# Altium PCB Nine-axis Gyroscope Module.PcbDoc
Units mil, origin at the board's own origin, x right, y up, seen from the top; angles counter-clockwise.
Board outline 505 x 595 mil, 4 copper layers (Top Layer, POWER, SIGNAL, Bottom Layer), stack 23.756 mil thick; 32 components, 23 nets, 130 pads, 33 vias.
Unrouted connection lines stored in the file: 17.
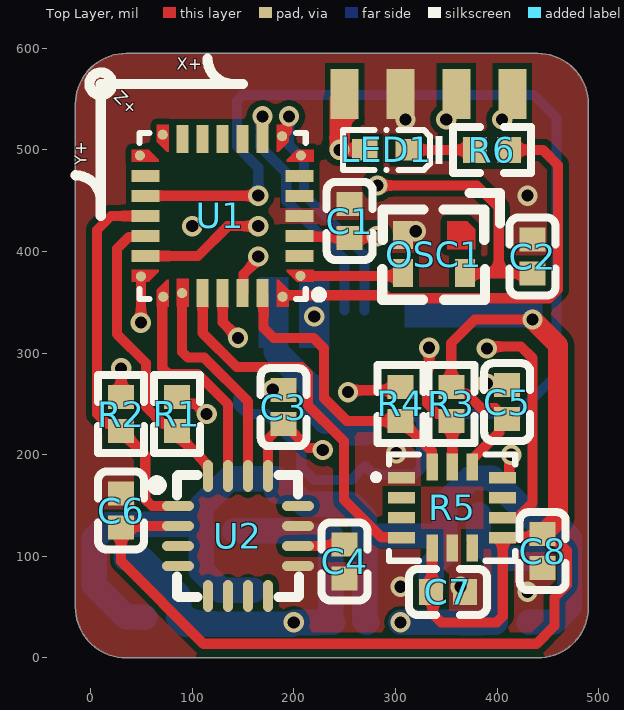
[diagram p0: Top Layer view]
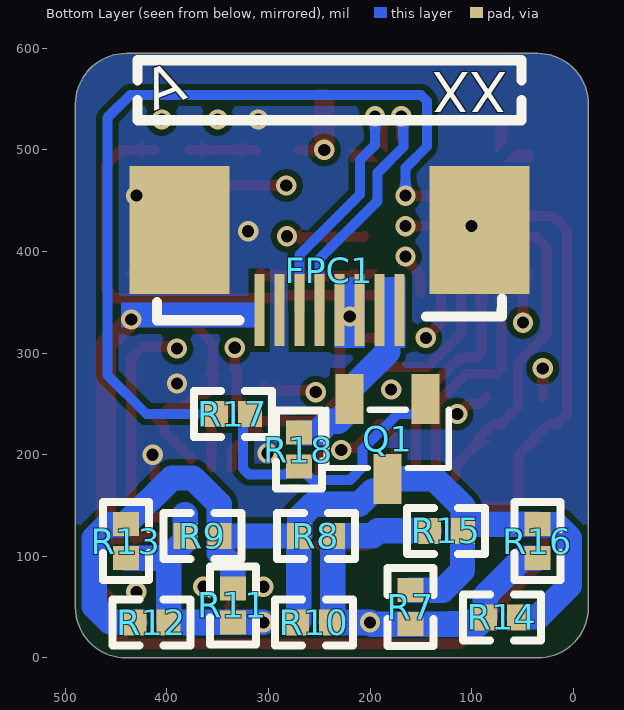
[diagram p1: Bottom Layer view, seen from below]
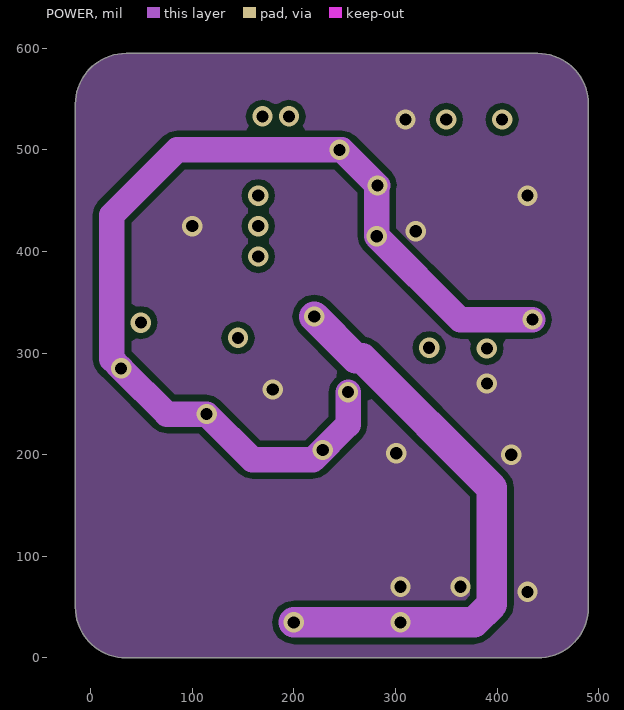
[diagram p2: POWER]
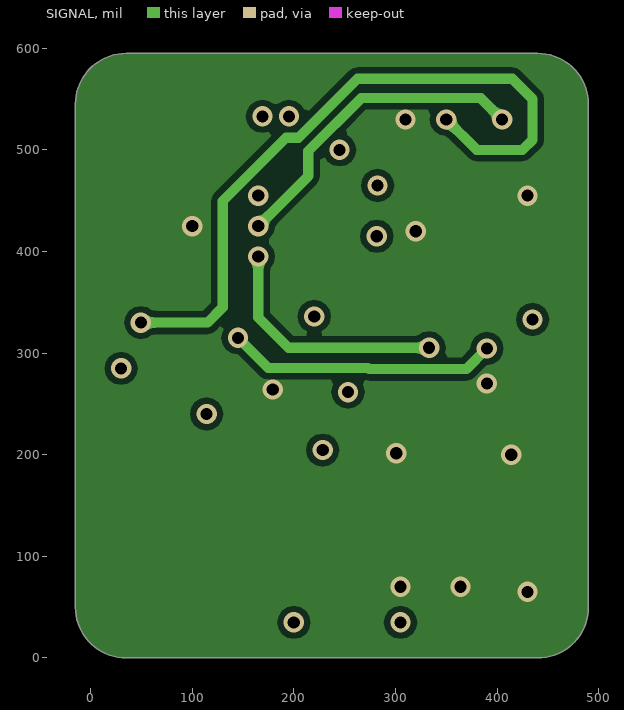
[diagram p3: SIGNAL]
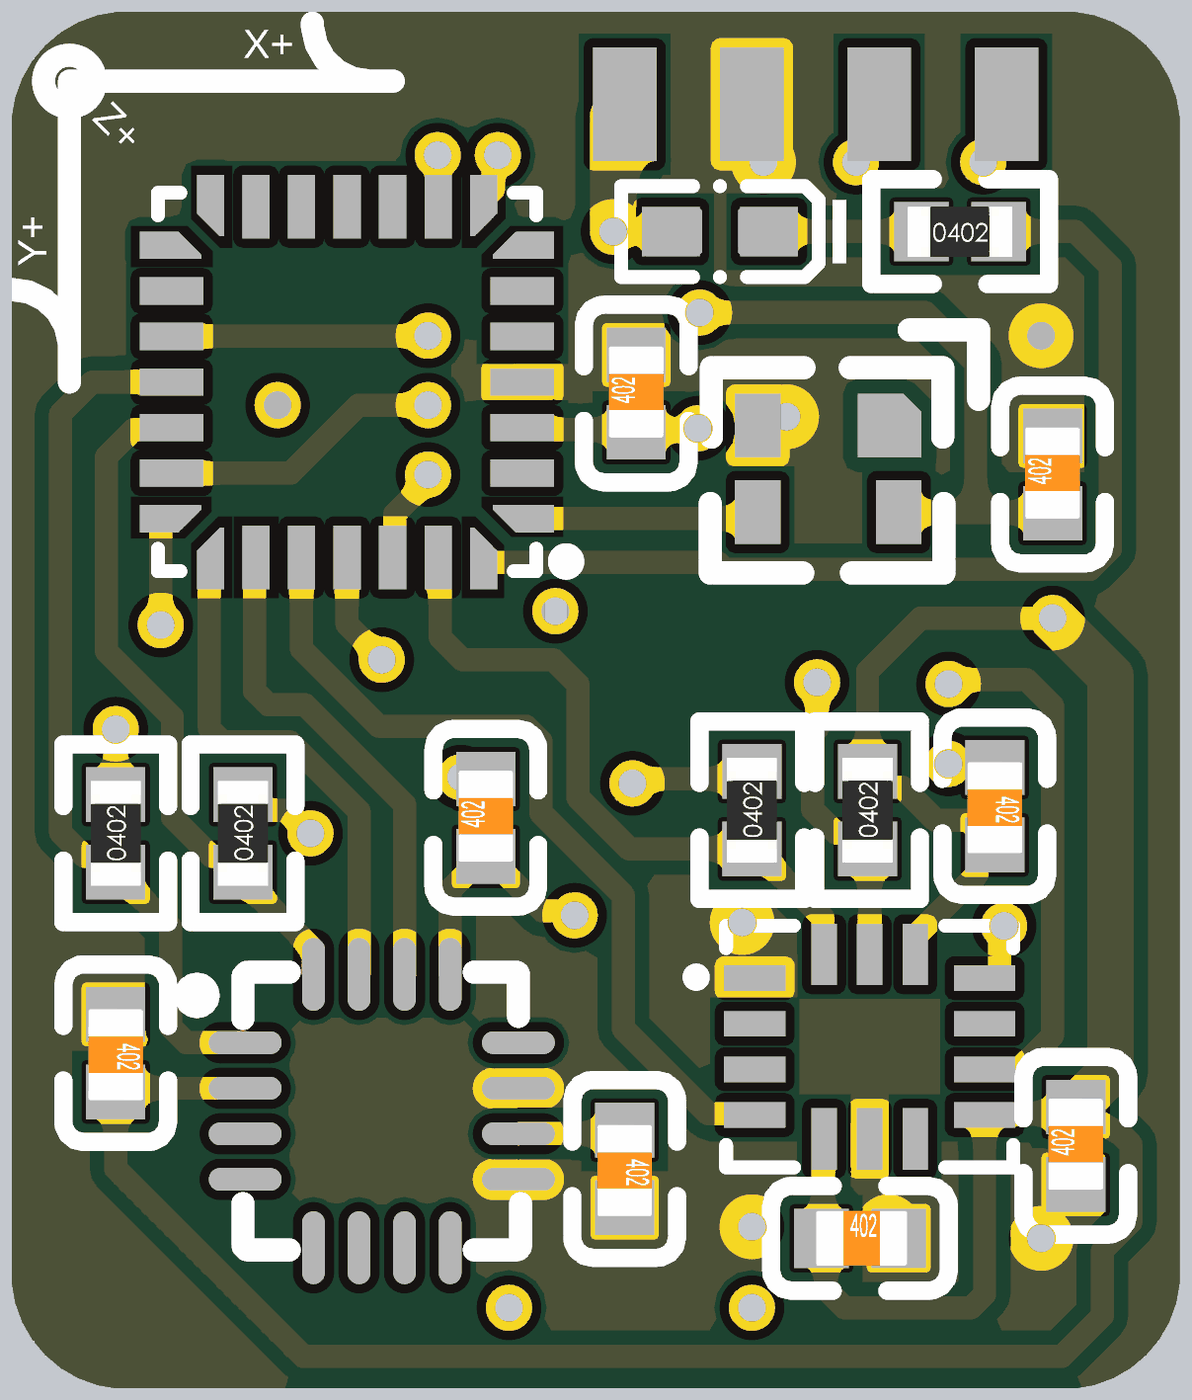
[diagram p4: 3D render of the assembled board from above, using the file's embedded part models]
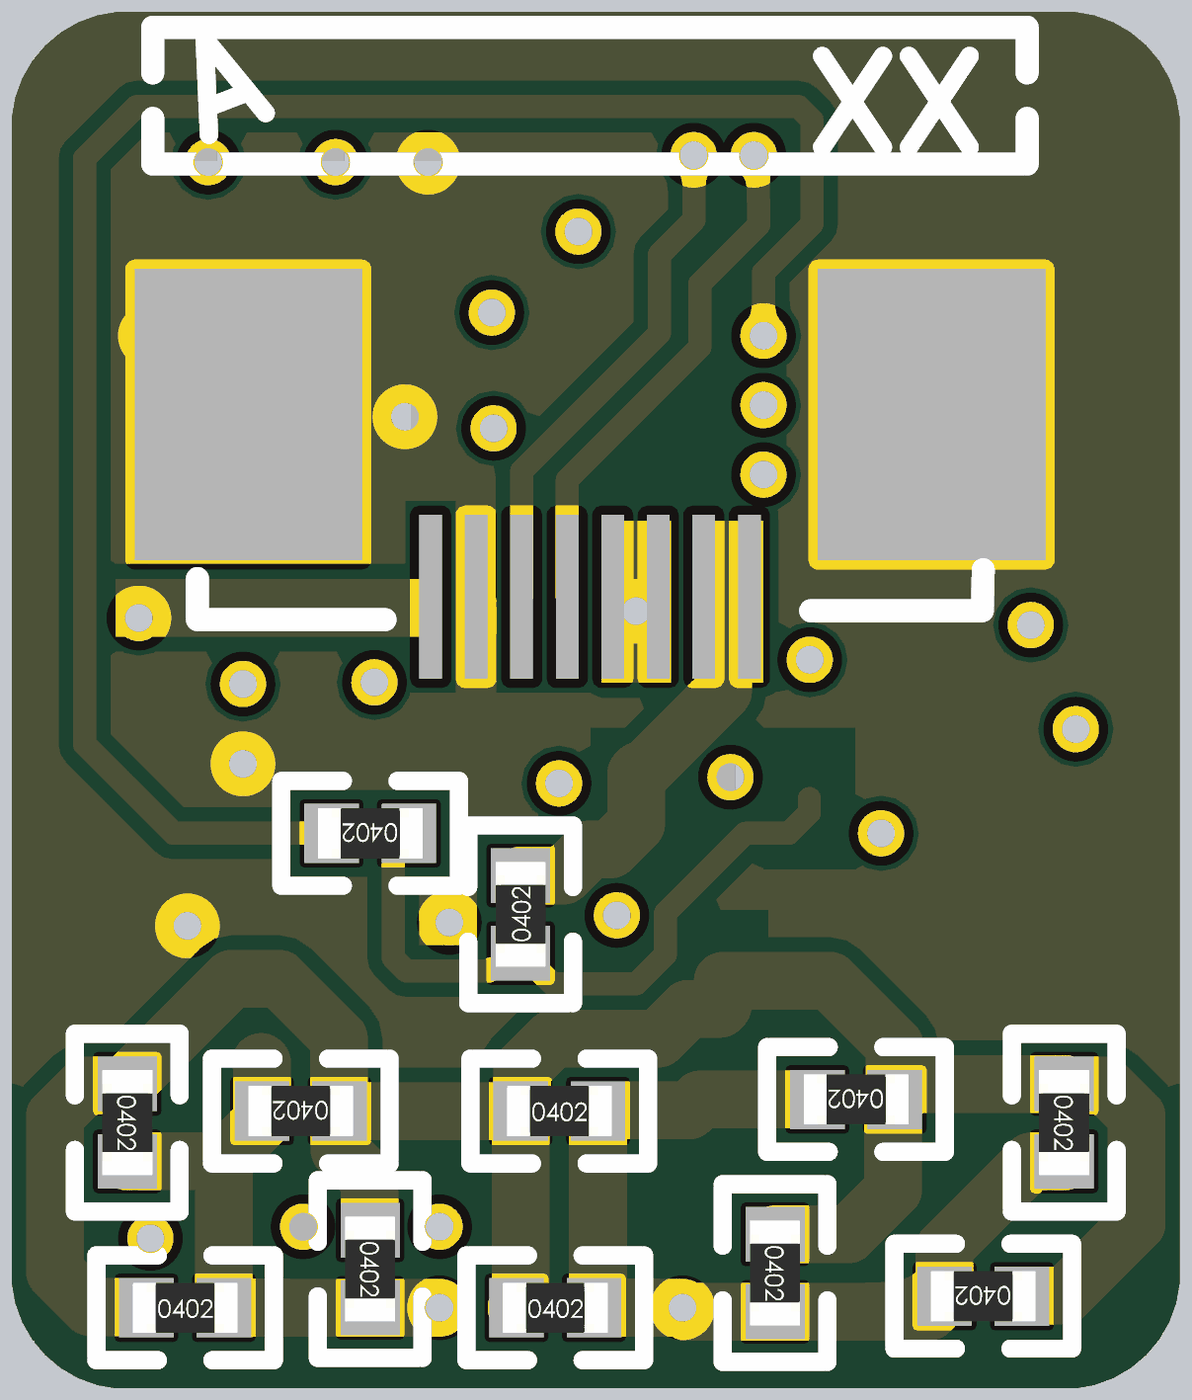
[diagram p5: 3D render of the assembled board from below, using the file's embedded part models]

## Layer stack, top to bottom
Top Solder: solder mask 0.4, Solder Resist, Dk 3.5
Top Layer: signal copper 1.4
Dielectric 2: prepreg 2.8, PP-006, Dk 4.1
POWER: signal copper 1.378
Dielectric 1: dielectric 12.6, FR-4, Dk 4.8
SIGNAL: signal copper 1.378
Dielectric 3: prepreg 2.8, PP-006, Dk 4.1
Bottom Layer: signal copper 1.4
Bottom Solder: solder mask 0.4, Solder Resist, Dk 3.5

## Board outline
-15,50 -15,545 cw(c35,545) 35,595 440,595 cw(c440,545) 490,545 490,50 cw(c440,50) 440,0 35,0 cw(c35,50)

## Design rules (kind name [scope] priority, off if disabled: settings)
Clearance [All] p1: gap=6 ignorepadtopadclearanceinfootprint=FALSE except(0: Arc-Hole Track-Hole SMDPad-Hole THPad-Hole Via-Text Via-Hole Fill-Hole Poly-Hole Region-Hole Text-Hole; 8: Text-Text)
MinimumSolderMaskSliver [All] p1: minsoldermaskwidth=0
PolygonConnect [All] p1: connectstyle=Direct reliefconductorwidth=10 reliefentries=4 polygonreliefangle="90 Angle" airgapwidth=10
RoutingVias [All] p1: holewidth=12 width=20 viastyle="Through Hole" minholewidth=12 minwidth=20 maxholewidth=12 maxwidth=20
SilkToSilkClearance [All] p1: silktosilkclearance=0
SilkToSolderMaskClearance [IsPad] p1: minsilkscreentomaskgap=0 clearancetoexposedcopper=TRUE
SolderMaskExpansion [All] p1: expansion=4 istentingtop=FALSE
Width [InNetClass('POWER')] p1: maxlimit=40 minlimit=10 preferedwidth=40 midlayer1_minwidth=40 midlayer2_minwidth=40 minimp=50.000000 maximp=50.000000 favimp=50.000000
27 further rules are at their usual default settings.

## Components (designator, comment, footprint, x,y, rotation, side; value= is the part's Value field where it differs from the comment)
C1 "100nF" 0402_C 255,430 r90 top
C2 "100nF" 0402_C 435,395 r90 top
C3 "100nF" 0402_C 190,246.73 r90 top
C4 "4.7uF" 0402_C 250,95 r270 top
C5 "100nF" 0402_C 410,251.73 r270 top
C6 "100nF" 0402_C 30,145 r270 top
C7 "100nF" 0402_C 351.73,65 r0 top
C8 "100nF" 0402_C 445,105 r90 top
FPC1 "LW05202-08" FPC-SMD_8P-P0.50_LW05202-08 240,450 r0 bottom
LED1 "LED" LED0402-RD 335.18,233.89 r180 top
OSC1 "8MHz" OSC-SMD_4P-L2.0-W1.6-BL_ABRACON_AMPMAXXX 345,405 r180 top
Q1 "YJL3400A" SOT-23-3_L2.9-W1.3-P1.90-LS2.4-BR 16779.6,-16736.99 r90 bottom
R1 "4.7KΩ" 0402_R 85,240 r90 top
R2 "4.7KΩ" 0402_R 30,240 r90 top
R3 "4.7KΩ" 0402_R 355,250 r90 top
R4 "4.7KΩ" 0402_R 305,250 r90 top
R5 "ICM-42688-P" LGA-14_L3.0-W2.5-P0.50-TL 351.18,143.53 r0 top
R6 "4.7K" 0402_R 395,500 r0 top
R7 "430R" 0402_R 160,50 r270 bottom
R8 "430R" 0402_R 253.27,120 r180 bottom
R9 "430R" 0402_R 365,120 r0 bottom
R10 "430R" 0402_R 255,35 r180 bottom
R11 "430R" 0402_R 335,51.73 r270 bottom
R12 "430R" 0402_R 415,35 r180 bottom
R13 "430R" 0402_R 440,115 r270 bottom
R14 "430R" 0402_R 70,40 r0 bottom
R15 "430R" 0402_R 125,125 r0 bottom
R16 "430R" 0402_R 35,115 r270 bottom
R17 "120R" 0402_R 335,240 r0 bottom
R18 "10K" 0402_R 270,205 r90 bottom
U1 "STM32G031G8U6" UFQFPN-28_L4.0-W4.0-P0.50-BL 130,435 r90 top
U2 "IST8310" LGA-16-3*3 140,120 r0 top

## Footprints (in the part's own frame and the unit in brackets; to place one, negate y for a bottom-side part, rotate by r counter-clockwise, add the part's x,y. Pads: shape width x height; smd on the part's side, far side on the other; paste and mask are expansions set on the pad)
0402_C [mm]
  rect 0.6x0.65 smd mask+0.051: 1(-0.425,0) 2(0.425,0)
  silkscreen extent -0.97,-0.58 0.97,0.58, body extent -0.48,-0.3 0.52,0.3, height 0.2
0402_R [mm]
  rect 0.6x0.65 smd mask+0.051: 1(-0.425,0) 2(0.425,0)
  silkscreen extent -0.97,-0.58 0.97,0.58, body extent -0.57,-0.27 0.58,0.28, height 0.41
FPC-SMD_8P-P0.50_LW05202-08 [mm]
  rect 0.25x1.8 smd: 1(1.75,2.738) 2(1.25,2.738) 3(0.75,2.738) 4(0.25,2.738) 5(-0.25,2.738) 6(-0.75,2.738) 7(-1.25,2.738) 8(-1.75,2.738)
  rect 2.5x3.2 smd: 9(-3.75,0.738) 10(3.75,0.738)
  silkscreen extent -4.8,-3.51 4.8,2.99
LED0402-RD [mm]
  rect 0.636x0.54 smd: 1(0.579,-6.759) 2(1.656,-6.759)
  silkscreen extent -0.27,-7.3 2.2,-6.22
LGA-14_L3.0-W2.5-P0.50-TL [mm]
  rect 0.675x0.28 smd: 1(-1.142,0.86) 2(-1.142,0.36) 3(-1.142,-0.14) 4(-1.142,-0.64) 8(1.382,-0.64) 9(1.382,-0.14) 10(1.382,0.36) 11(1.382,0.86)
  rect 0.28x0.675 smd: 5(-0.38,-0.903) 6(0.12,-0.903) 7(0.62,-0.903) 12(0.62,1.122) 13(0.12,1.122) 14(-0.38,1.122)
  silkscreen extent -1.86,-1.22 1.7,1.44
LGA-16-3*3 [mm]
  oval 0.8x0.25 smd: 1(-1.372,0.75) 2(-1.372,0.25) 3(-1.372,-0.25) 4(-1.372,-0.75) 9(1.628,-0.75) 10(1.628,-0.25) 11(1.628,0.25) 12(1.628,0.75)
  oval 0.25x0.8 smd: 5(-0.623,-1.5) 6(-0.123,-1.5) 7(0.377,-1.5) 8(0.877,-1.5) 13(0.877,1.5) 14(0.377,1.5) 15(-0.123,1.5) 16(-0.623,1.5)
  silkscreen extent -2.03,-1.52 1.65,1.52
OSC-SMD_4P-L2.0-W1.6-BL_ABRACON_AMPMAXXX [mm]
  rect 0.5x0.7 smd: 2(0.953,-0.284) 3(0.953,0.666) 4(-0.597,0.666)
  Top Layer region: -0.847,0.066 -0.147,0.066 -0.147,-0.634 -0.647,-0.634 -0.847,-0.434
  silkscreen extent -1.47,-1.33 1.47,1.33
SOT-23-3_L2.9-W1.3-P1.90-LS2.4-BR [mm]
  rect 1.25x0.7 smd: 1(431.596,-422.514) 2(431.596,-420.614) 3(429.597,-421.564)
  silkscreen extent 429.87,-423.09 431.32,-420.04
UFQFPN-28_L4.0-W4.0-P0.50-BL [mm]
  round 0.254 smd mask+0.102: 1(-1.499,-1.943) 7(1.511,-1.956) 8(1.994,-1.486) 14(2.032,1.499) 15(1.511,2.07) 21(-1.511,2.045) 22(-2.019,1.486) 23(-1.93,1.016) 28(-2.019,-1.499)
  rect 0.3x0.7 smd: 2(-1,-1.925) 3(-0.5,-1.925) 4(0,-1.925) 5(0.5,-1.925) 6(1,-1.925) 16(1,1.925) 17(0.5,1.925) 18(0,1.925) 19(-0.5,1.925) 20(-1,1.925)
  rect 0.7x0.3 smd: 9(1.925,-1) 10(1.925,-0.5) 11(1.925,0) 12(1.925,0.5) 13(1.925,1) 24(-1.925,0.5) 25(-1.925,0) 26(-1.925,-0.5) 27(-1.925,-1)
  Top Layer region: -2.275,1.15 -1.575,1.15 -1.575,0.85 -2.275,0.85
  Top Layer region: 1.85,1.65 2.275,1.65 2.275,1.35 1.6,1.35 1.6,1.4
  Top Layer region: 1.65,1.85 1.65,2.275 1.35,2.275 1.35,1.6 1.4,1.6
  Top Layer region: -1.85,1.65 -2.275,1.65 -2.275,1.35 -1.6,1.35 -1.6,1.4
  Top Layer region: -1.65,1.85 -1.65,2.275 -1.35,2.275 -1.35,1.6 -1.4,1.6
  Top Layer region: -1.65,-1.85 -1.65,-2.275 -1.35,-2.275 -1.35,-1.6 -1.4,-1.6
  Top Layer region: -1.85,-1.65 -2.275,-1.65 -2.275,-1.35 -1.6,-1.35 -1.6,-1.4
  Top Layer region: 1.85,-1.65 2.275,-1.65 2.275,-1.35 1.6,-1.35 1.6,-1.4
  Top Layer region: 1.65,-1.85 1.65,-2.275 1.35,-2.275 1.35,-1.6 1.4,-1.6
  silkscreen extent -2.08,-2.51 2.08,2.08

## Part data
C1 C2 C3 C5 C6 C7 C8: library part "0402 100nF (104) 10% 16V", "贴片电容", Package=0402, SuppliersPartNumber=C1525, ComponentLink1Description=供应商链接, ComponentLink1URL=http://www.szlcsc.com/product/details_1877.html, Supplier=LC
C4: library part "0402 4.7uF (475) 20% 10V", "贴片电容", Package=0402, SuppliersPartNumber=C23733, ComponentLink1Description=供应商链接, ComponentLink1URL=http://www.szlcsc.com/product/details_24469.html, Supplier=LC
LED1: library part TJ-S1005CL4T5ALC3DW-A5
OSC1: library part AMPMAFC-25.0000T
R1 R2 R3 R4 R6 R7 R8 R9 R10 R11 R12 R13 R14 R15 R16 R17 R18: library part "0402 4.7KΩ (4701) 1%", "贴片电阻", Package=0402, SuppliersPartNumber=C25900, ComponentLink1Description=供应商链接, ComponentLink1URL=http://www.szlcsc.com/product/details_26643.html, Supplier=LC

## Free pads (board coordinates)
  rect 27.56x49.21 smd: 2(250,555) 2(305,555) 2(360,555) 2(415,555)

## Via types
v1: diameter 20, hole 12, Top Layer to Bottom Layer, 33 vias

## Nets (pads, with @x,y where several pads share a name; then routed paths per layer and width w, separated by ;. In a path a pad name is that pad's centre, name@x,y a point inside that pad or via, vN(x,y) a via of type N, cw(c..) or ccw(c..) an arc to the next point about the centre after c; other vN are vias at no path point)
3V3_IMU: C1.1 C2.1 C3.1 C5.2 C6.2 C7.1 C8.2 FPC1.1 LED1.2 OSC1.4 pad.2@250,555 R1.2 R2.2 R3.2 R4.2 R5.5 R5.8 R5.12 U1.3 U2.2 U2.13 | length 3049.1
  Top Layer w10: R2.2 v1(30,285) ; R1.2 91.81,249.92 103.32,249.92 113.24,240 v1(114.18,240) ; U2.2 31.58,129.85 C6.2 30,95 111,14 439,14 456.46,31.46 456.46,59.57 468.8,71.9 468.8,105.68 465.02,109.46 453.43,116.5 452.8,116.5 C8.2@447.8,119.92 ; U2.13 174.55,215.53 189.02,230 190.98,230 214.52,206.46 226.46,206.46 v1(228.38,204.55) ; U1.3 206.69,414.41 253.86,414.41 C1.1 255.87,414.13 280.79,414.13 v1(281.66,415) ; v1(245,500) LED1.2 ; pad.2@245,550 pad.2@250,555 ; v1(253.37,261.58) 255.29,263.49 301.76,263.49 R4.2 ; v1(282.43,465) 380,465 401.76,443.24 401.76,378.53 ; R5.5 335.71,107.48 335.71,65.71 C7.1 336.94,63.06 336.94,43.06 345,35 399.73,35 405.59,40.86 R5.8 406.1,118.84 442.1,118.84 C8.2 ; OSC1.4 368.79,378.53 401.76,378.53 ; R5.12@376.1,196 402.2,222.1 402.2,228.19 C5.2@409.02,235 ; C5.2 C5.2@409.02,235 ; v1(435,333.02) 378.02,333.02 355,310 R3.2 361.81,259.92 370.08,259.92 384.35,245.65 398.36,245.65 C5.2@409.02,235 ; C2.1 434.73,378.53 401.76,378.53 ; C8.2@447.8,123.54 C8.2@447.8,124.53
  Top Layer w20: v1(245,500) pad.2@245,550 ; v1(435,333.02) 460,308.02 460,136.73 458,134.73 C8.2@447.8,124.53 ; C8.2 445.98,121.73 C8.2@447.8,123.54
  POWER w25: v1(253.37,261.58) 253.37,229.55 218.83,195 159.18,195 v1(114.18,240) 75,240 v1(30,285) 20.96,294.04 20.96,435.96 85,500 v1(245,500) 247.43,500 v1(282.43,465) 281.66,464.22 v1(281.66,415) 363.64,333.02 v1(435,333.02)
5V_HEAT: FPC1.5 FPC1.6 R7.2 R8.2 R9.2 R10.2 R11.2 R12.2 R13.2 R14.2 R15.2 R16.2 | length 1233.2
  POWER w30: v1(200,35) 377.43,35 395,52.57 395,167.33 267.25,295.08 260.94,295.08 v1(220.04,335.98)
  Bottom Layer w25: R16.2 49.3,98.27 86.73,60.84 R14.2 93.46,33.27 R7.2 198.27,33.27 v1(200,35) R10.2 ; R15.2 192.42,125 197.13,120.3 236.24,120.3 R8.2 R10.2@236.54,36.73 ; v1(305,35) R11.2 R12.2 398.27,97.23 399.31,98.27 ; 382.2,141.18 381.73,140.72 381.73,115.84 399.31,98.27 ; R13.2 399.31,98.27
GND: C1.2 C2.2 C3.2 C4.2 C5.1 C6.1 C7.2 C8.1 FPC1.2 FPC1.9 FPC1.10 OSC1.2 pad.2@305,555 R5.1 R5.6 R5.11 U1.4 U2.9 U2.11 | length 29.6
  Top Layer w10: R5.11 411.57,177.38 412.09,177.89 412.09,198.09 v1(414,200)
  other v1: 430,65 305,70 364,70 300.78,201.47 179.27,264.27 390,270 320,420 100,425 430,455 310,530
GND_HEAT: FPC1.7 FPC1.8 Q1.2 R18.2 | length 172.9
  Bottom Layer w25: 180,340 182.5,337.5 182.5,301.34 216.73,267.11 218.72,267.11 220,265.83 220,244.17 231.12,233.05 235.92,233.05 240.18,233.05 251.5,221.73 R18.2
I2C1_SCL: R3.1 R5.13 U1.26 | length 415.1
  Top Layer w10: U1.26 150.59,360.12 150.59,377.88 165,392.29 v1(165,395) ; v1(333.16,305.23) 333.16,285.06 331.2,283.1 331.2,250.37 341.49,240.08 348.19,240.08 355.9,232.36 R5.13
  SIGNAL w10: v1(165,395) 165,335 194.77,305.23 v1(333.16,305.23)
I2C1_SDA: R4.1 R5.14 U1.27 | length 294.2
  Top Layer w10: U1.27 170.28,358.31 170.28,324.72 180,315 219.14,315 229.8,304.35 229.8,255.46 251.99,233.27 R4.1 ; R4.1@305.98,233.27 335.71,203.55 335.71,188.22 R5.14
I2C2_SCL: R2.1 U1.18 U2.1 | length 377.9
  Top Layer w10: U1.18 20,435 6.2,421.2 6.2,240.37 16.49,230.08 23.19,230.08 R2.1 30.98,223.27 37.8,216.46 37.8,215.47 53.8,199.47 53.8,156.2 60.47,149.54 U2.1
I2C2_SDA: R1.1 U1.19 U2.16 | length 298.6
  Top Layer w10: U1.19 53.31,414.41 37.75,414.41 26,402.66 26,318.7 54.46,290.24 54.46,247.11 71.49,230.08 78.19,230.08 R1.1 85.98,223.27 92.8,216.46 92.8,212.42 115.49,189.72 U2.16
NetC4_1: C4.1 U2.10 | length 46.6
  Top Layer w10: U2.10 204.16,110.24 248.51,110.24 C4.1
NetLED1_1: LED1.1 R6.1 | length 65.9
  Top Layer w10: LED1.1 R6.1
NetOSC1_3: OSC1.3 U1.1 | length 102.2
  Top Layer w10: U1.1 304.7,376 OSC1.3
NetQ1_1: Q1.1 R17.1 R18.1 | length 295.1
  Bottom Layer w10: Q1.1 145.2,248.78 153.98,240 172.8,240 207.38,205.43 207.38,187.62 220,175 256.35,175 262.2,180.86 262.2,181.46 269.02,188.27 270.98,188.27 277.8,181.46 282.67,181.46 283.65,180.47 319.22,180.47 325.08,186.33 325.08,233.19 R17.1
NetQ1_3: Q1.3 R7.1 R8.1 R9.1 R10.1 R11.1 R12.1 R13.1 R14.1 R15.1 R16.1 | length 1080.6
  Bottom Layer w25: R14.1 52.97,40.3 34.7,40.3 3.7,71.3 3.7,117.74 17.01,131.04 34.7,131.04 35,131.34 R16.1 101.14,131.73 107.87,125 R15.1 ; R7.1 128.27,66.73 108.96,86.04 108.96,124.7 108.66,125 R15.1 ; R10.1 271.34,35 270,36.34 R8.1 ; R11.1@335.3,69.15 335.3,90.3 348.27,103.27 R9.1 R8.1 ; R9.1@348.56,120.3 348.56,151.39 374.29,177.12 395,177.12 440,132.13 440,131.34 440.3,131.04 457.99,131.04 471.3,117.74 471.3,50.63 455.96,35.3 432.03,35.3 R12.1 ; R15.1 108.27,148.27 136.26,176.26 Q1.3 182.6,165.44 183.88,164.16 197.61,164.16 210.47,151.3 256.01,151.3 269.31,137.99 269.31,120.3 269.61,120 R8.1
PA15: U1.22 U2.15 | length 220.6
  Top Layer w10: U1.22 70.46,354.46 70.46,285.4 76.31,279.54 105.2,279.54 135.18,249.57 U2.15
PB3: U1.23 U2.14 | length 216.2
  Top Layer w10: U1.23 90,301.4 95.86,295.54 111.83,295.54 154.86,252.52 U2.14
PB4: R5.4 U1.24 | length 370.8
  Top Layer w10: U1.24 110.31,319.69 143.72,286.28 207.35,286.28 213.8,279.83 213.8,248.83 245,217.63 249.38,213.25 249.38,155.62 286.16,118.84 305.71,118.84 R5.4
PB5: R5.9 U1.25 | length 544.8
  Top Layer w10: U1.25 130,330.43 145,315.43 v1(145,315) ; v1(390,304.52) 391.91,306.43 423.49,306.43 435,294.92 435,152.75 420.77,138.52 406.1,138.52 R5.9
  SIGNAL w10: v1(145,315) 174.73,285.27 273.06,285.27 274.09,284.23 369.72,284.23 v1(390,304.52)
PB8: R6.2 U1.28 | length 452.8
  Top Layer w10: U1.28@189.5,355 191.48,356.98 290.14,356.98 293.1,354.02 451.18,354.02 460,362.84 460,485 445,500 R6.2
SWCLK: pad.2@360,555 U1.21 | length 741.7
  Top Layer w10: v1(49.46,330) v1(49.46,330) U1.21
  SIGNAL w10: v1(49.46,330) 115,330 130,345 130,449.7 192.3,512 204.67,512 262.67,570 415,570 435,550 435,510 425,500 380,500 v1(350,530)
SWDIO: pad.2@415,555 U1.20 | length 438.3
  Top Layer w10: U1.20 105.63,395.63 135,425 v1(165,425)
  SIGNAL w10: v1(165,425) 214.21,474.21 214.21,498.91 266.3,551 384,551 v1(405,530)
TIM2_CH3: R17.2 U1.17 | length 914.7
  Top Layer w10: U1.17 54.37,454.84 164.84,454.84 v1(165,455)
  Bottom Layer w10: v1(165,455) 165,482.37 144,503.37 144,548.14 149.86,554 436,554 458.5,531.5 458.5,278.5 420,240 R17.2
USART2_RX: FPC1.4 U1.9 | length 248.3
  Top Layer w10: v1(169.19,533) 169.28,532.91 169.28,510.88 U1.9
  Bottom Layer w10: v1(169.19,533) 167.27,531.09 167.27,513.27 167,513 167,503 192.5,477.5 192.5,449.96 249.84,392.62 FPC1.4
USART2_TX: FPC1.3 U1.8 | length 244
  Top Layer w10: U1.8 193.27,518.27 193.27,531.09 v1(195.19,533)
  Bottom Layer w10: v1(195.19,533) 195,532.81 195,505 210,490 210,456.08 269.53,396.55 FPC1.3
pads on no net: R5.2 R5.3 R5.7 R5.10 U1.2 U1.5 U1.6 U1.7 U1.10 U1.11 U1.12 U1.13 U1.14 U1.15 U1.16 U2.3 U2.4 U2.5 U2.6 U2.7 U2.8 U2.12

## Polygon pours and split planes (outlines as drawn)
GND on Top Layer "GND_L01_P000" (solid, remove dead copper, pour order 0): -15,50 -15,545 cw(c35,545) 35,595 440,595 cw(c440,545) 490,545 490,50 cw(c440,50) 440,0 35,0 cw(c35,50)
GND on SIGNAL "GND_L03_P003" (solid, remove dead copper, pour order 3): -15,50 -15,545 cw(c35,545) 35,595 440,595 cw(c440,545) 490,545 490,50 cw(c440,50) 440,0 35,0 cw(c35,50)
GND on POWER "GND_L02_P002" (solid, remove dead copper, pour order 2): -15,50 -15,545 cw(c35,545) 35,595 440,595 cw(c440,545) 490,545 490,50 cw(c440,50) 440,0 35,0 cw(c35,50)
GND on Bottom Layer "GND_L04_P001" (solid, remove dead copper, pour order 1): -15,50 -15,545 cw(c35,545) 35,595 440,595 cw(c440,545) 490,545 490,50 cw(c440,50) 440,0 35,0 cw(c35,50)

## Other copper
Bottom Layer:
  rectangle net 3V3_IMU: 308.9,325 445,350
  rectangle net 5V_HEAT: 205,305 235,375
  rectangle net GND_HEAT: 165,305 195,375

## Silkscreen, mask and mechanical layers (free items; w line width, h text height)
Top Overlay:
  circle w10: c10,565 r11.18
  lines w10: -15,475 cw(c-15,450) 10,450 10,435 10,565 150,565 140,565 cw(c140,590) 115,590
  text "X+" at 85,575 h20
  text "Z+" at 19.39,548.54 h20 r315
  text "Y+" at 0,485.02 h20 r90
Mechanical 1:
  lines w10: -15,50 ccw(c35,50) 35,0 145,0 440,0 ccw(c440,50) 490,50 490,545 ccw(c440,545) 440,595 35,595 ccw(c35,545) -15,545 -15,50
Drill Drawing:
  lines w10: -917.71,922.5 -851.04,922.5 -851.04,989.17 -917.71,989.17 -917.71,922.5
  lines w15: -977.5,877.5 9493.6,877.5 ; -977.5,1027.5 9493.6,1027.5 ; -426.62,727.5 -426.62,1177.5 ; 113.24,727.5 113.24,1177.5 ; 1202.92,727.5 1202.92,1177.5 ; 1708.8,727.5 1708.8,1177.5 ; 2442.6,727.5 2442.6,1177.5 ; 3942.15,727.5 3942.15,1177.5 ; 4532,727.5 4532,1177.5 ; 5277.79,727.5 5277.79,1177.5 ; 5927.62,727.5 5927.62,1177.5 ; 6781.39,727.5 6781.39,1177.5 ; 8114.99,727.5 8114.99,1177.5 ; -977.5,727.5 9493.6,727.5 9493.6,1177.5 -977.5,1177.5 -977.5,727.5
  text "Symbol" at -887.5,1072.5 h72
  text "Count" at -381.62,1072.5 h72
  text "Hole Size" at 158.24,1072.5 h72
  text "Plated" at 1247.92,1072.5 h72
  text "Hole Type" at 1753.8,1072.5 h72
  text "Drill Layer Pair" at 2487.6,1072.5 h72
  text "Via/Pad" at 3987.15,1072.5 h72
  text "Pad Shape" at 4577,1072.5 h72
  text "Template" at 5322.79,1072.5 h72
  text "Description" at 5972.62,1072.5 h72
  text "Hole Tolerance (+)" at 6826.39,1072.5 h72
  text "Hole Tolerance (-)" at 8159.99,1072.5 h72
  text "33" at -381.62,922.5 h60
  text "12.00mil (0.305mm)" at 158.24,922.5 h60
  text "PTH" at 1247.92,922.5 h60
  text "Round" at 1753.8,922.5 h60
  text "Top Layer - Bottom Layer" at 2487.6,922.5 h60
  text "Via" at 3987.15,922.5 h60
  text "Rounded" at 4577,922.5 h60
  text "v51h30" at 5322.79,922.5 h60
  text "33 Total" at -381.62,772.5 h60

## Dimensions
-15,50 to 490,50 on Mechanical 1
35,0 to 35,595 on Mechanical 1

## Text inside footprints (layer, text, board x,y; h text height)
FPC1: Bottom Overlay "A" at 412.94,538.19 h39.37 r339; Bottom Overlay "XX" at 65,576.25 h39.37 r180